# Altium PCB final.PcbDoc
Units mm, origin at the board's own origin, x right, y up, seen from the top; angles counter-clockwise.
Board outline 59 x 59 mm, 2 copper layers (Top Layer, Bottom Layer); 9 components, 24 nets, 53 pads, 1 vias.
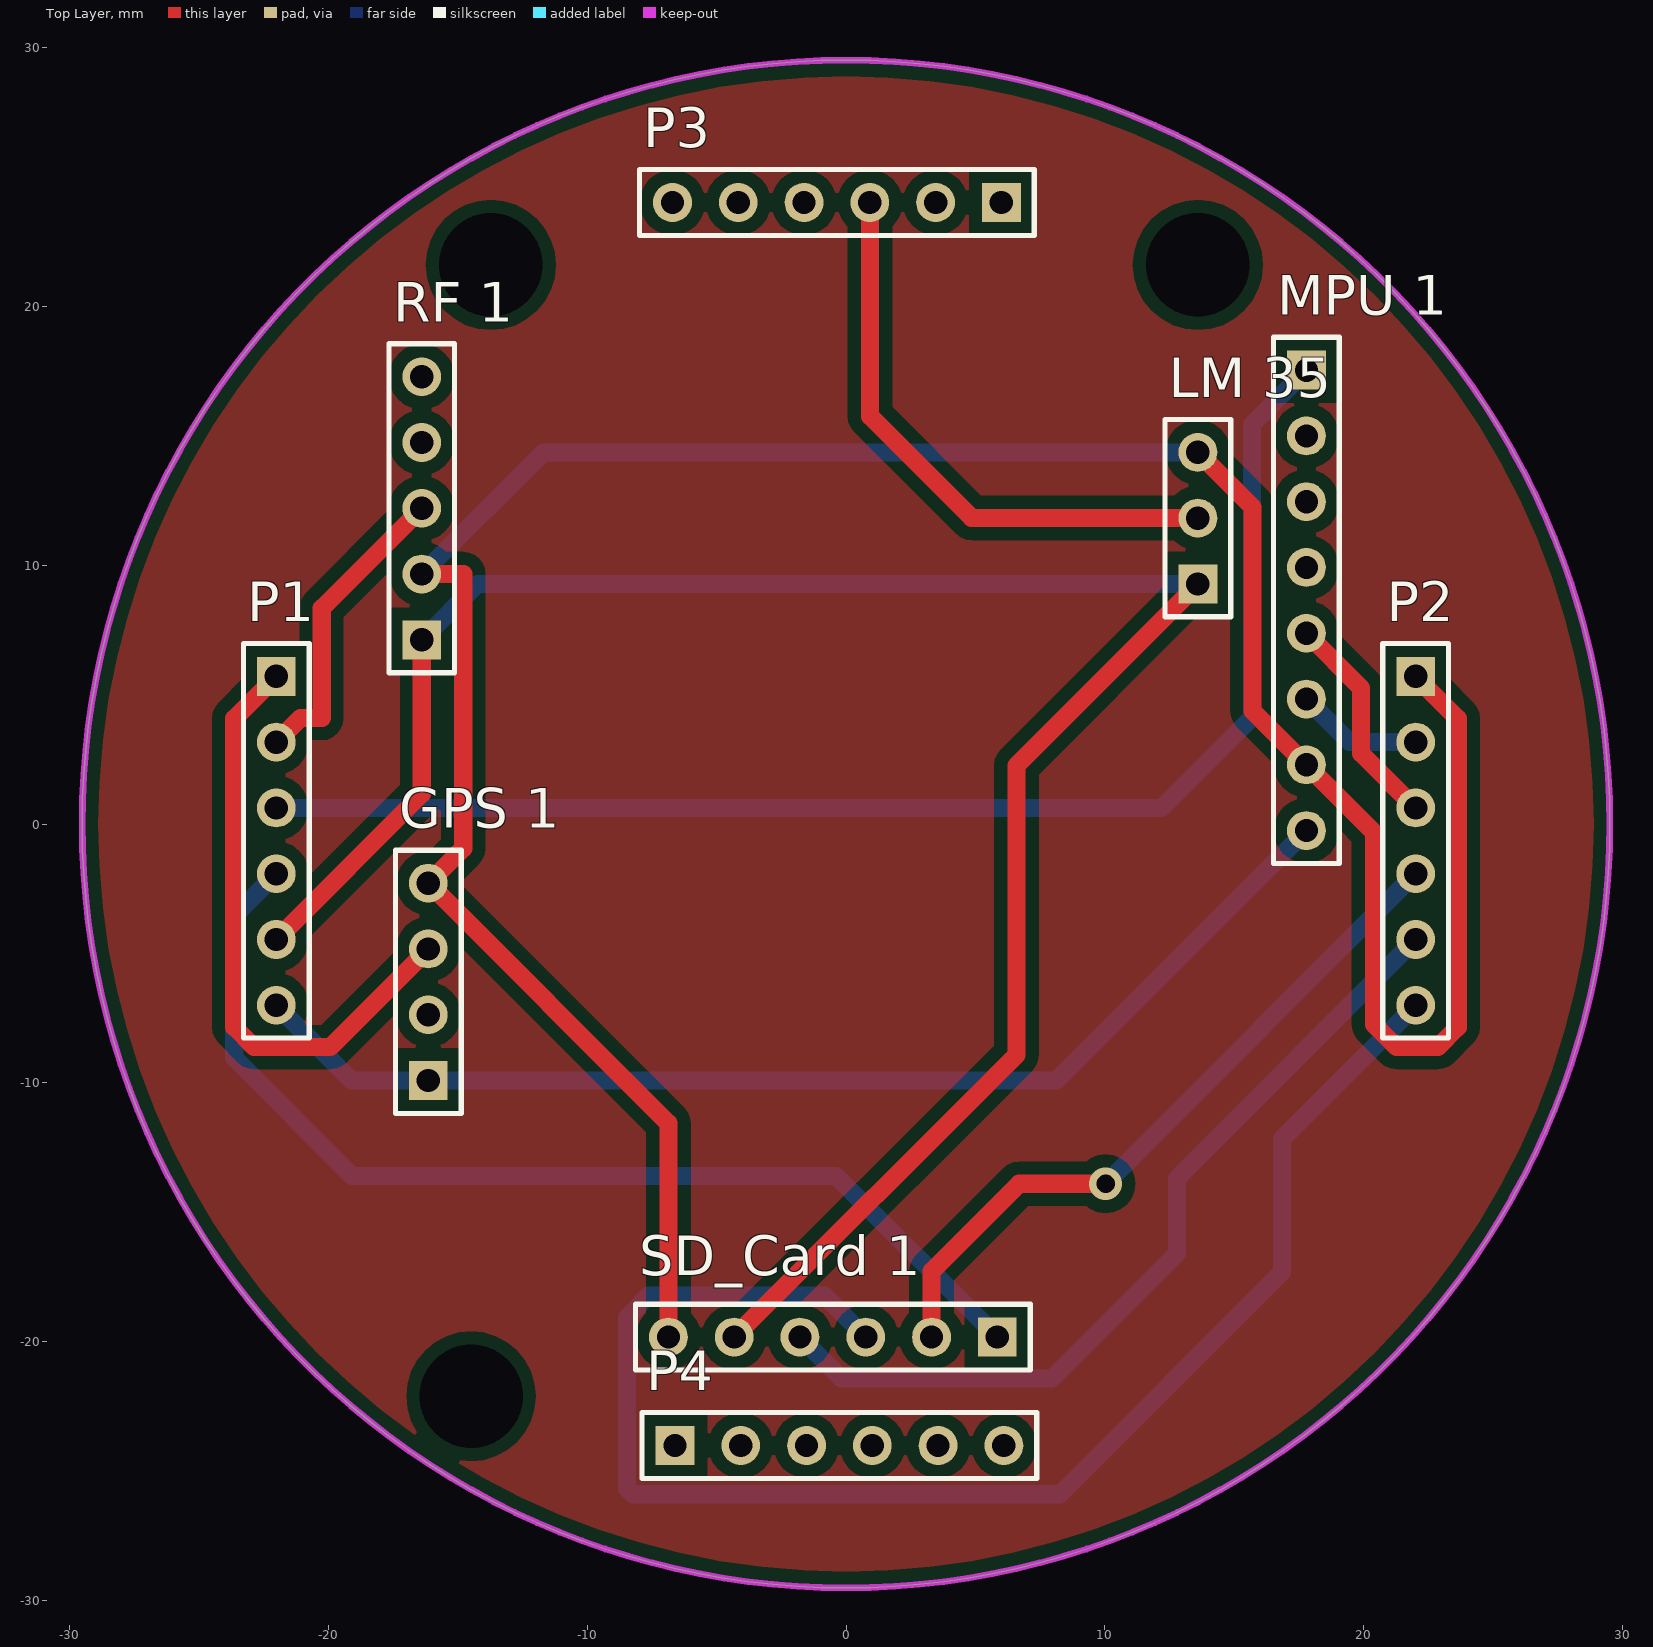
[diagram p0: Top Layer view]
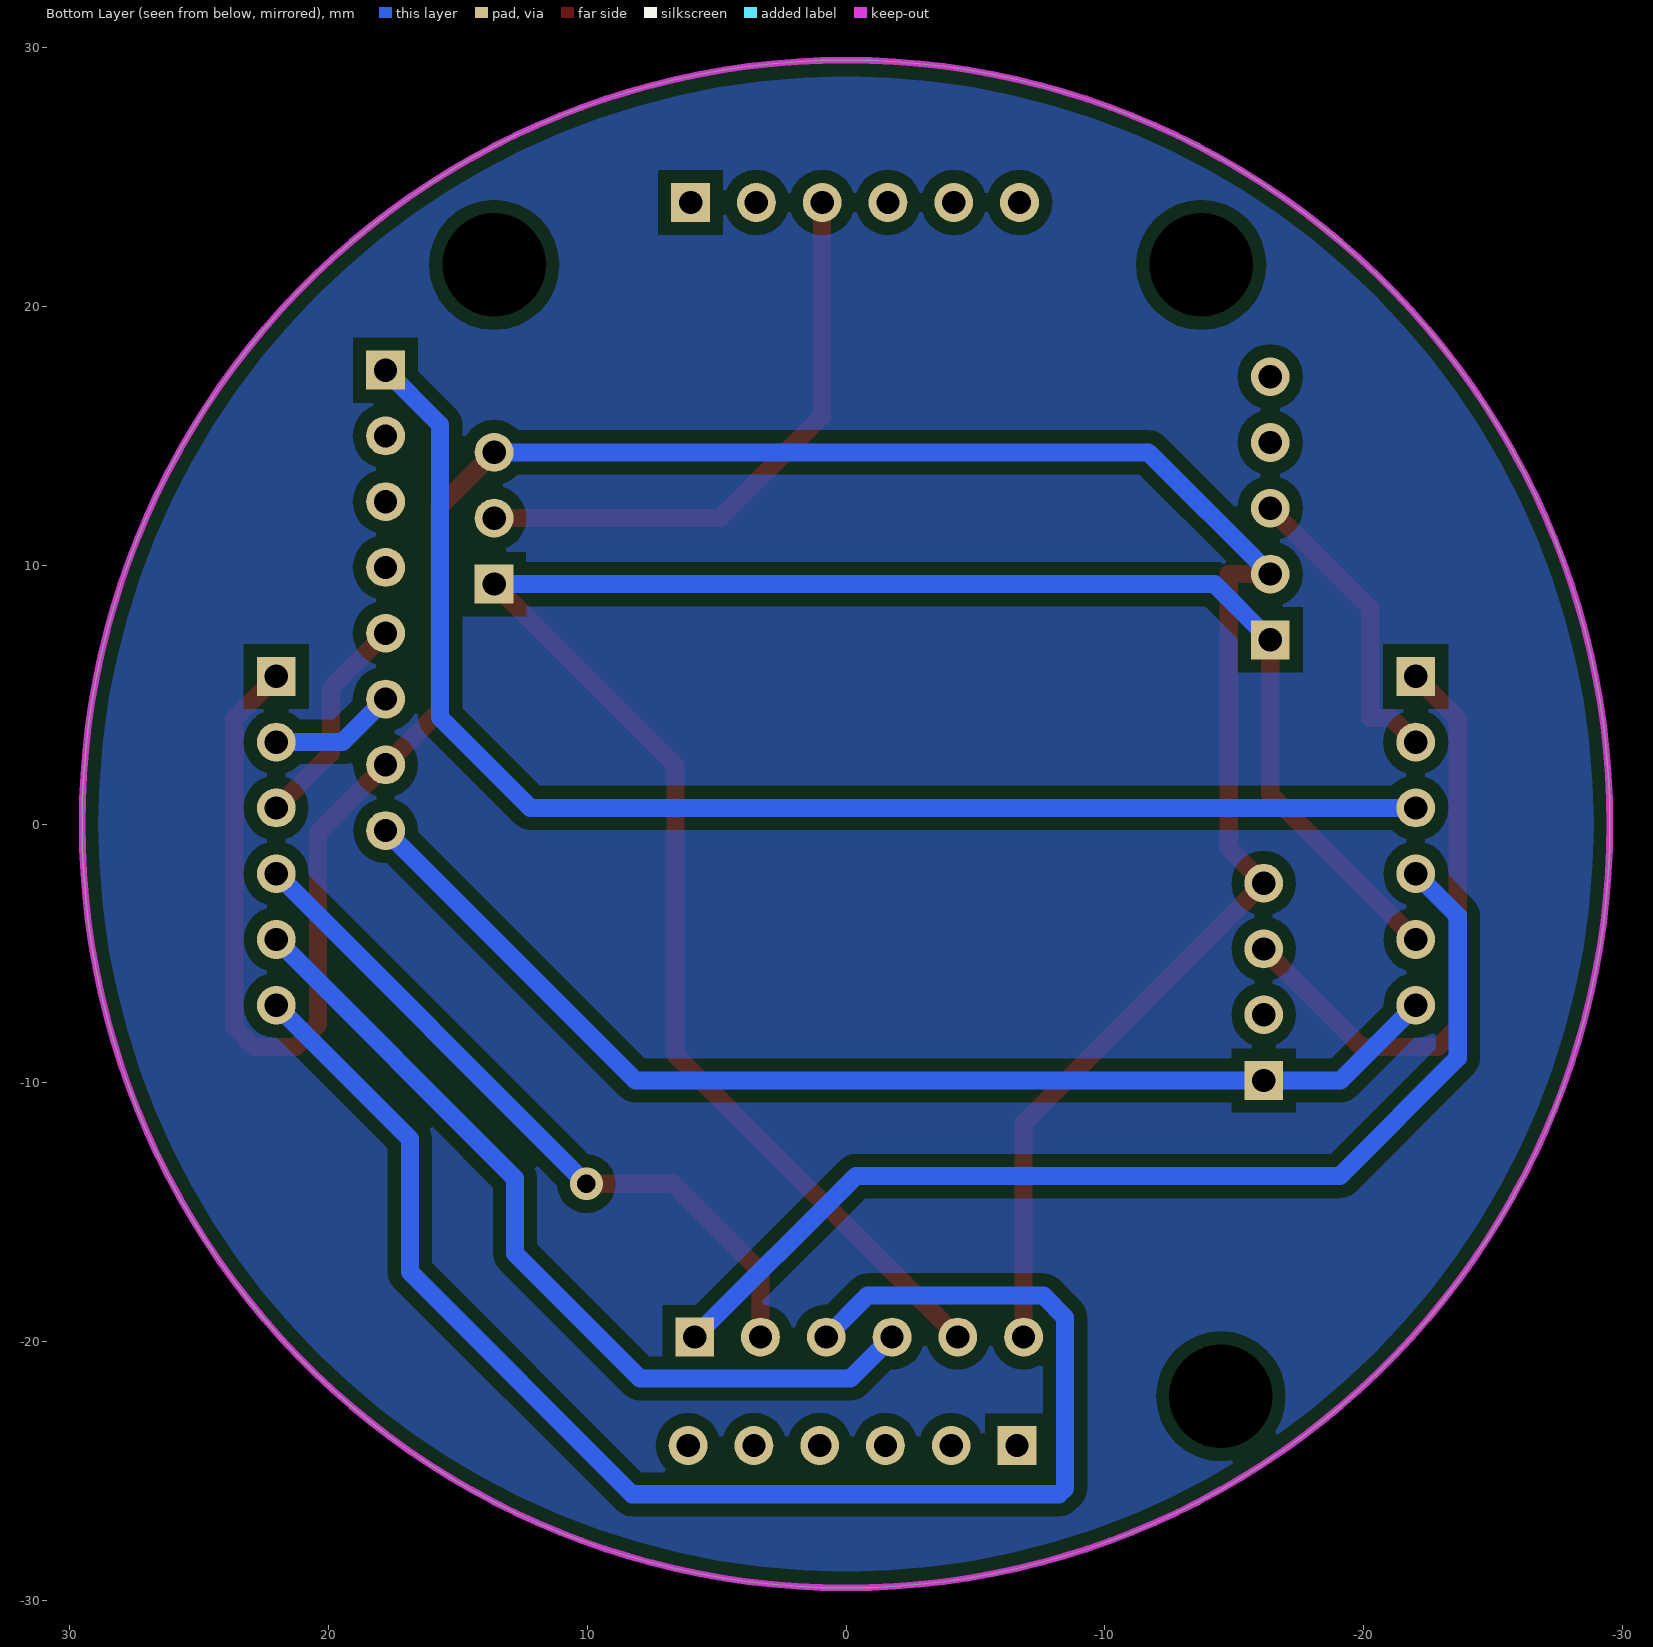
[diagram p1: Bottom Layer view, seen from below]

## Layer stack, top to bottom
Top Solder: solder mask 0.0102, Solder Resist, Dk 3.5
Top Layer: signal copper 0.0356
Dielectric 1: dielectric 0.32, FR-4, Dk 4.8
Bottom Layer: signal copper 0.0356
Bottom Solder: solder mask 0.0102, Solder Resist, Dk 3.5

## Board outline
-29.5,0 ccw(c0,0) 0,-29.5 ccw(c0,0) 29.5,0 ccw(c0,0) 0,29.5 ccw(c0,0)

## Design rules (kind name [scope] priority, off if disabled: settings)
Clearance [All] p1: gap=0.5 ignorepadtopadclearanceinfootprint=FALSE
ComponentClearance [All] p1: gap=0 collisioncheckmode=3 verticalgap=0 showdistances=FALSE
PolygonConnect [All] p1: connectstyle=Relief reliefconductorwidth=0.254 reliefentries=4 polygonreliefangle="90 Angle" airgapwidth=0.254
RoutingVias [All] p1: holewidth=0.711 width=1.27 viastyle="Through Hole" minholewidth=0.711 minwidth=1.27 maxholewidth=0.711 maxwidth=1.27
SolderMaskExpansion [All] p1: expansion=0.102
Width [All] p1: maxlimit=1 minlimit=0.5 preferedwidth=0.7
29 further rules are at their usual default settings.

## Components (designator, comment, footprint, x,y, rotation, side; value= is the part's Value field where it differs from the comment)
"GPS 1" "Header 4" HDR1X4 -16.129,-9.906 r90 top
"LM 35" "Header 3" HDR1X3 13.589,9.271 r90 top
"MPU 1" "Header 8" HDR1X8 17.78,17.526 r270 top
P1 "Header 6" HDR1X6 -22,5.7 r270 top
P2 "Header 6" HDR1X6 22,5.7 r270 top
P3 "Header 6" HDR1X6 6,24 r180 top
P4 "Header 6" HDR1X6 -6.604,-24 r0 top
"RF 1" "Header 5" HDR1X5 -16.383,7.112 r90 top
"SD_Card 1" "Header 6" HDR1X6 5.842,-19.812 r180 top

## Footprints (in the part's own frame and the unit in brackets; to place one, negate y for a bottom-side part, rotate by r counter-clockwise, add the part's x,y. Pads: shape width x height; smd on the part's side, far side on the other; paste and mask are expansions set on the pad)
HDR1X3 [mm] "Connector; Header; 3 Position"
  rect 1.5x1.5 hole 0.9: 1(0,0)
  round 1.5 hole 0.9: 2(2.54,0) 3(5.08,0)
  silkscreen extent -1.27,-1.27 6.35,1.27
HDR1X4 [mm] "Connector; Header; 4 Position"
  rect 1.5x1.5 hole 0.9: 1(0,0)
  round 1.5 hole 0.9: 2(2.54,0) 3(5.08,0) 4(7.62,0)
  silkscreen extent -1.27,-1.27 8.89,1.27
HDR1X5 [mm] "Connector; Header; 5 Position"
  rect 1.5x1.5 hole 0.9: 1(0,0)
  round 1.5 hole 0.9: 2(2.54,0) 3(5.08,0) 4(7.62,0) 5(10.16,0)
  silkscreen extent -1.27,-1.27 11.43,1.27
HDR1X6 [mm] "Connector; Header; 6 Position"
  rect 1.5x1.5 hole 0.9: 1(0,0)
  round 1.5 hole 0.9: 2(2.54,0) 3(5.08,0) 4(7.62,0) 5(10.16,0) 6(12.7,0)
  silkscreen extent -1.27,-1.27 13.97,1.27
HDR1X8 [mm] "Connector; Header; 8 Position"
  rect 1.5x1.5 hole 0.9: 1(0,0)
  round 1.5 hole 0.9: 2(2.54,0) 3(5.08,0) 4(7.62,0) 5(10.16,0) 6(12.7,0) 7(15.24,0) 8(17.78,0)
  silkscreen extent -1.27,-1.27 19.05,1.27

## Part data
"GPS 1": "Header, 4-Pin", LatestRevisionDate=17-Jul-2002, LatestRevisionNote="Re-released for DXP Platform.", Publisher="Altium Limited"
"LM 35": "Header, 3-Pin", LatestRevisionDate=17-Jul-2002, LatestRevisionNote="Re-released for DXP Platform.", Publisher="Altium Limited"
"MPU 1": "Header, 8-Pin", LatestRevisionDate=17-Jul-2002, LatestRevisionNote="Re-released for DXP Platform.", Publisher="Altium Limited"
P1 P2 P3 P4 "SD_Card 1": "Header, 6-Pin", LatestRevisionDate=17-Jul-2002, LatestRevisionNote="Re-released for DXP Platform.", Publisher="Altium Limited"
"RF 1": "Header, 5-Pin", LatestRevisionDate=17-Jul-2002, LatestRevisionNote="Re-released for DXP Platform.", Publisher="Altium Limited"

## Free pads (board coordinates)
  round 0 hole 4: 2(-14.478,-22.098) 2(-13.716,21.59) 2(13.589,21.59)

## Via types
v1: diameter 1.27, hole 0.711, Top Layer to Bottom Layer, 1 vias

## Nets (pads, with @x,y where several pads share a name; then routed paths per layer and width w, separated by ;. In a path a pad name is that pad's centre, name@x,y a point inside that pad or via, vN(x,y) a via of type N, cw(c..) or ccw(c..) an arc to the next point about the centre after c; other vN are vias at no path point)
"3.3 volt": "GPS 1.1" "MPU 1.8" P1.6 | length 45
  Bottom Layer w0.7: P1.6 -19.094,-9.906 -16.129,-9.906 8.128,-9.906 17.78,-0.254
"5 volt": "LM 35.1" "RF 1.1" "SD_Card 1.5" P1.5 | length 81.3
  Top Layer w0.7: P1.5 -16.383,1.157 -16.383,7.112 ; -4.318,-19.812 6.579,-8.915 6.579,2.261 13.589,9.271
  Bottom Layer w0.7: -16.383,7.112 -14.224,9.271 13.589,9.271
"Analog 0": P3.5
"Analog 1": P3.4
"Analog 2": "LM 35.2" P3.3 | length 22.6
  Top Layer w0.7: P3.3 0.92,15.748 4.857,11.811 13.589,11.811
"Analog 3": P3.2
AREF: P3.6
CS: "SD_Card 1.1" P1.4 | length 41.7
  Bottom Layer w0.7: P1.4 -23.622,-3.542 -23.622,-9.042 -19.075,-13.589 -0.381,-13.589 5.842,-19.812
"Digital 3": P3.1
"Digital 5": P4.1
"Digital 6": P4.2
"Digital 7": P4.3
"Digital 8": P4.4
"Digital 9": P4.5
"Digital 10": P4.6
GND: "GPS 1.4" "LM 35.3" "MPU 1.7" "RF 1.2" "SD_Card 1.6" P2.1 | length 110.4
  Top Layer w0.7: -16.383,9.652 -14.783,9.652 -14.783,-0.94 -16.129,-2.286 -6.858,-11.557 -6.858,-19.812 ; 13.589,14.351 15.697,12.243 15.697,4.369 17.78,2.286 20.396,-0.33 20.396,-7.747 21.26,-8.611 22.86,-8.611 23.622,-7.849 23.622,4.078 P2.1
  Bottom Layer w0.7: -16.383,9.652 -11.684,14.351 13.589,14.351
INT: "MPU 1.1" P1.3 | length 53.4
  Bottom Layer w0.7: P1.3 12.177,0.62 15.672,4.115 15.672,15.418 17.78,17.526
MISO: "SD_Card 1.4" P2.5 | length 33.2
  Bottom Layer w0.7: -1.778,-19.812 -0.178,-21.412 7.95,-21.412 12.776,-16.586 12.776,-13.684 P2.5
MOSI: "SD_Card 1.3" P2.6 | length 58.2
  Bottom Layer w0.7: 0.762,-19.812 -0.838,-18.212 -7.62,-18.212 -8.458,-19.05 -8.458,-25.654 -8.23,-25.883 8.255,-25.883 16.84,-17.297 16.84,-12.16 P2.6
RX: "GPS 1.3" P1.1 | length 23.6
  Top Layer w0.7: P1.1 -23.622,4.078 -23.622,-7.849 -22.86,-8.611 -19.914,-8.611 -16.129,-4.826
SCK: "SD_Card 1.2" P2.4 | length 27.6
  Top Layer w0.7: 3.302,-19.812 3.302,-17.272 6.68,-13.894 v1(10.026,-13.894)
  Bottom Layer w0.7: v1(10.026,-13.894) P2.4
SCL: "MPU 1.6" P2.2 | length 4.9
  Bottom Layer w0.7: 17.78,4.826 19.446,3.16 P2.2
SDA: "MPU 1.5" P2.3 | length 8.5
  Top Layer w0.7: 17.78,7.366 19.888,5.258 19.888,2.732 P2.3
TX: "RF 1.3" P1.2 | length 11.8
  Top Layer w0.7: P1.2 -21.071,4.089 -20.244,4.089 -20.244,8.331 -16.383,12.192
pads on no net: "GPS 1.2" "MPU 1.2" "MPU 1.3" "MPU 1.4" "RF 1.4" "RF 1.5"

## Polygon pours and split planes (outlines as drawn)
no net on Top Layer "Top Layer-No Net" (solid, pour order 0): -29.5,0 ccw(c0,0) 0,-29.5 ccw(c0,0) 29.5,0 ccw(c0,0) 0,29.5 ccw(c0,0)
no net on Bottom Layer "Bottom Layer-No Net" (solid, pour order 1): -29.5,0 ccw(c0,0) 0,-29.5 ccw(c0,0) 29.5,0 ccw(c0,0) 0,29.5 ccw(c0,0)

## Keep-outs
Keep-Out Layer:
  circle w0.254: c0,0 r29.5